# EAGLE board 2DBarcodeScanner-Panel (EAGLE 9.5.2), part 1 of 2
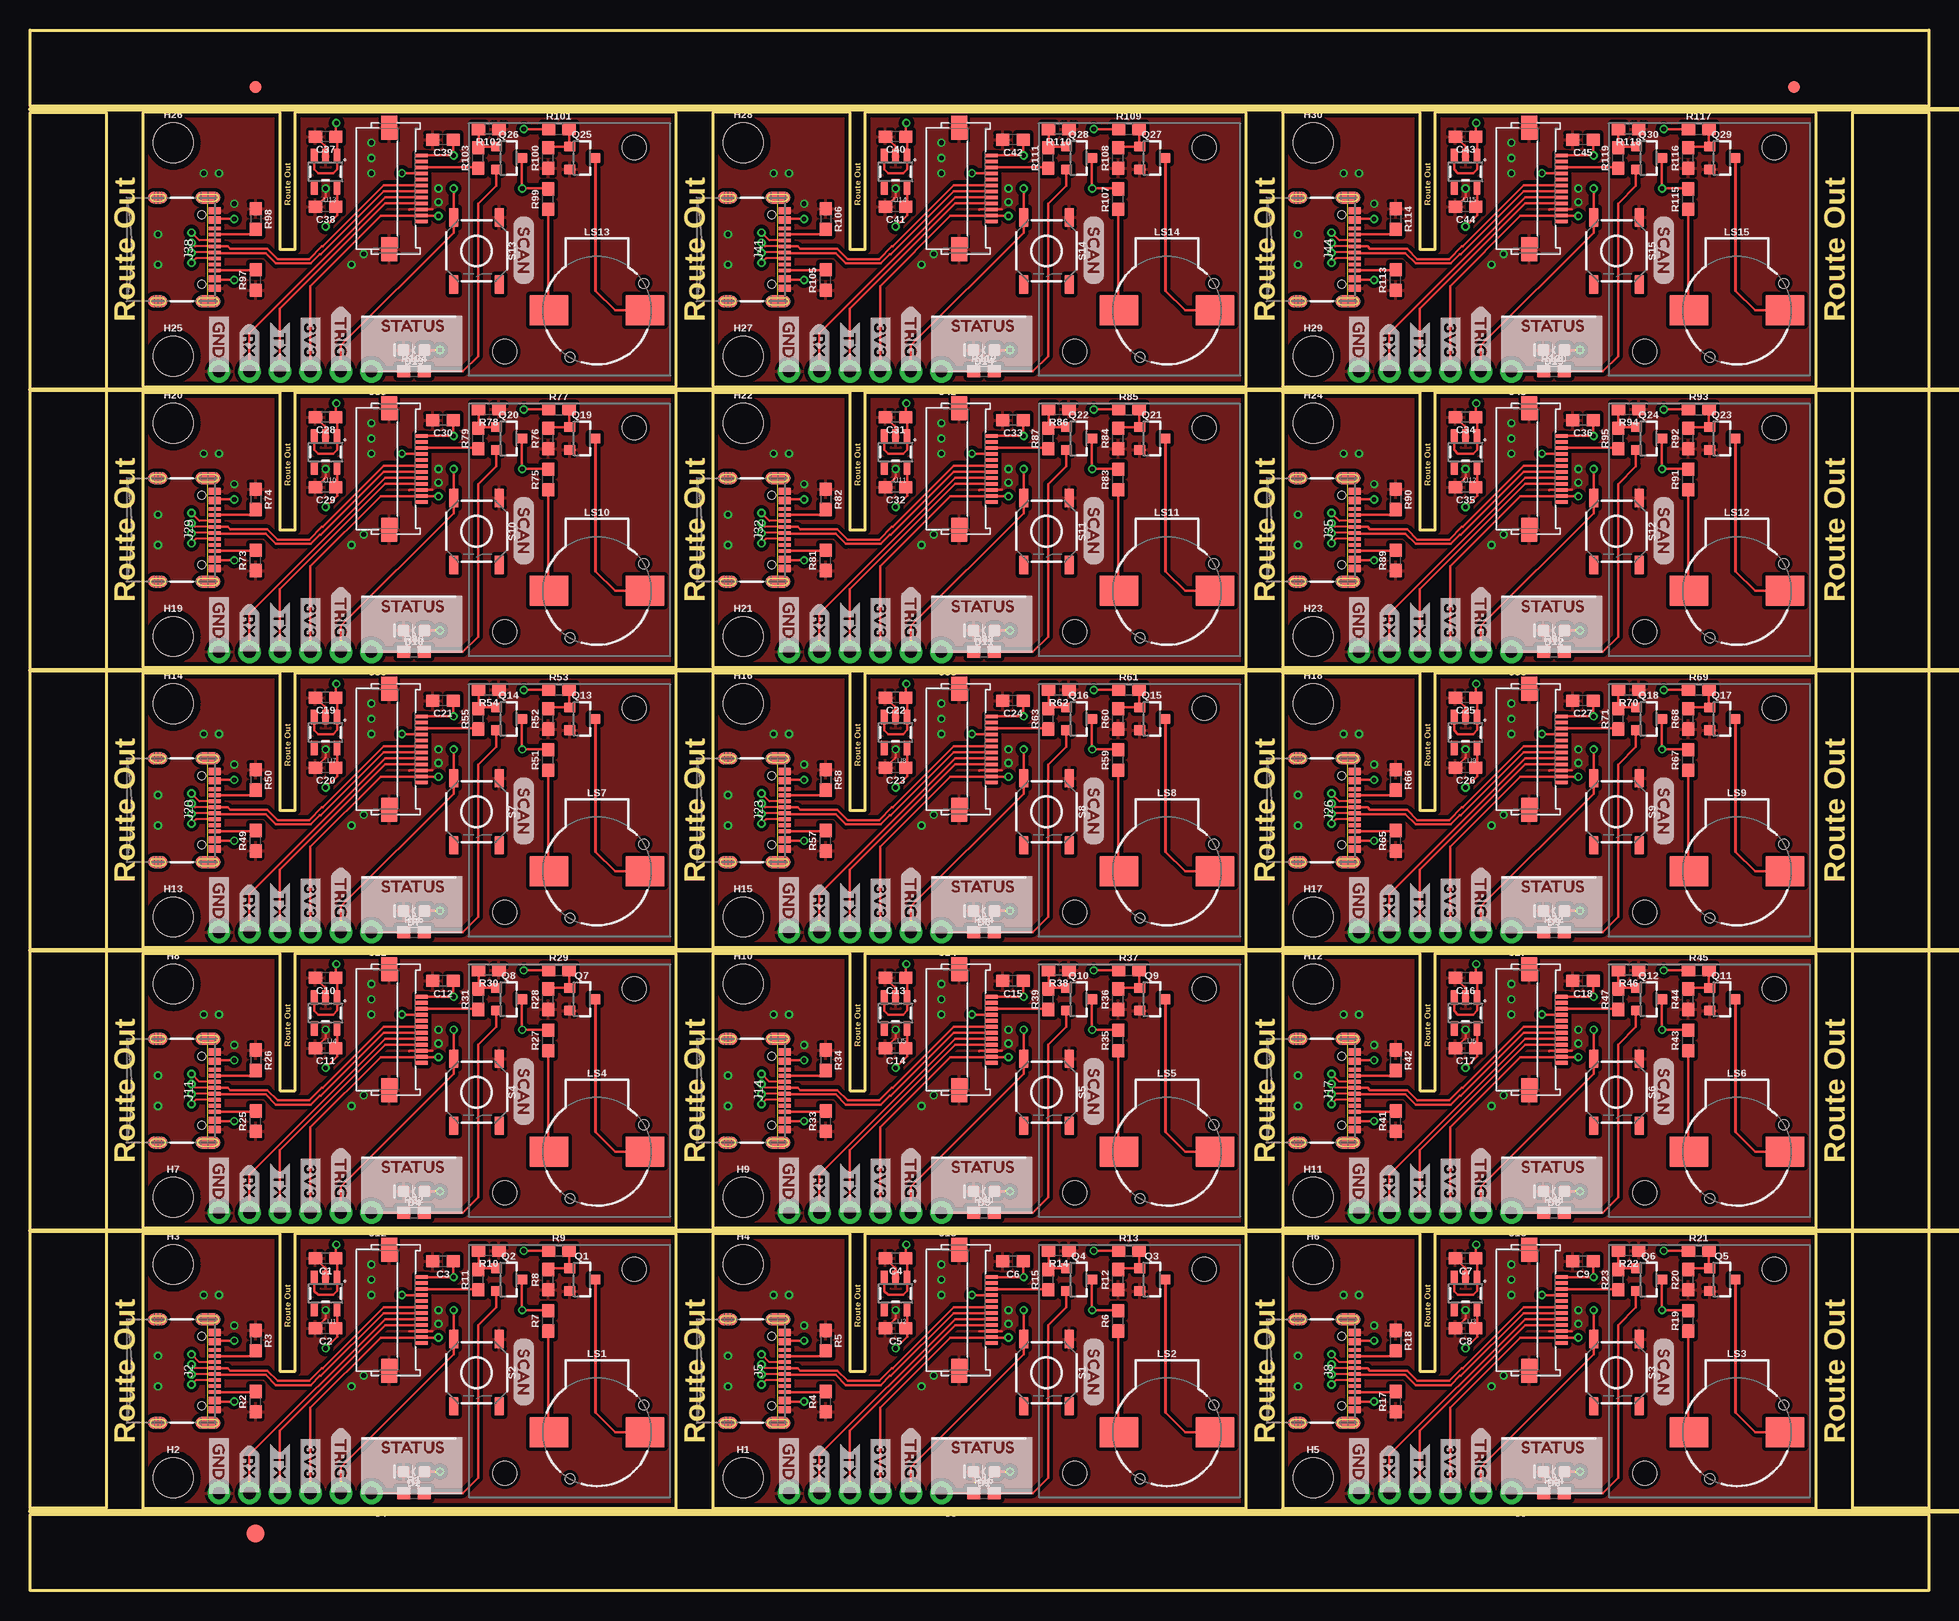
[diagram p0: board, top side]
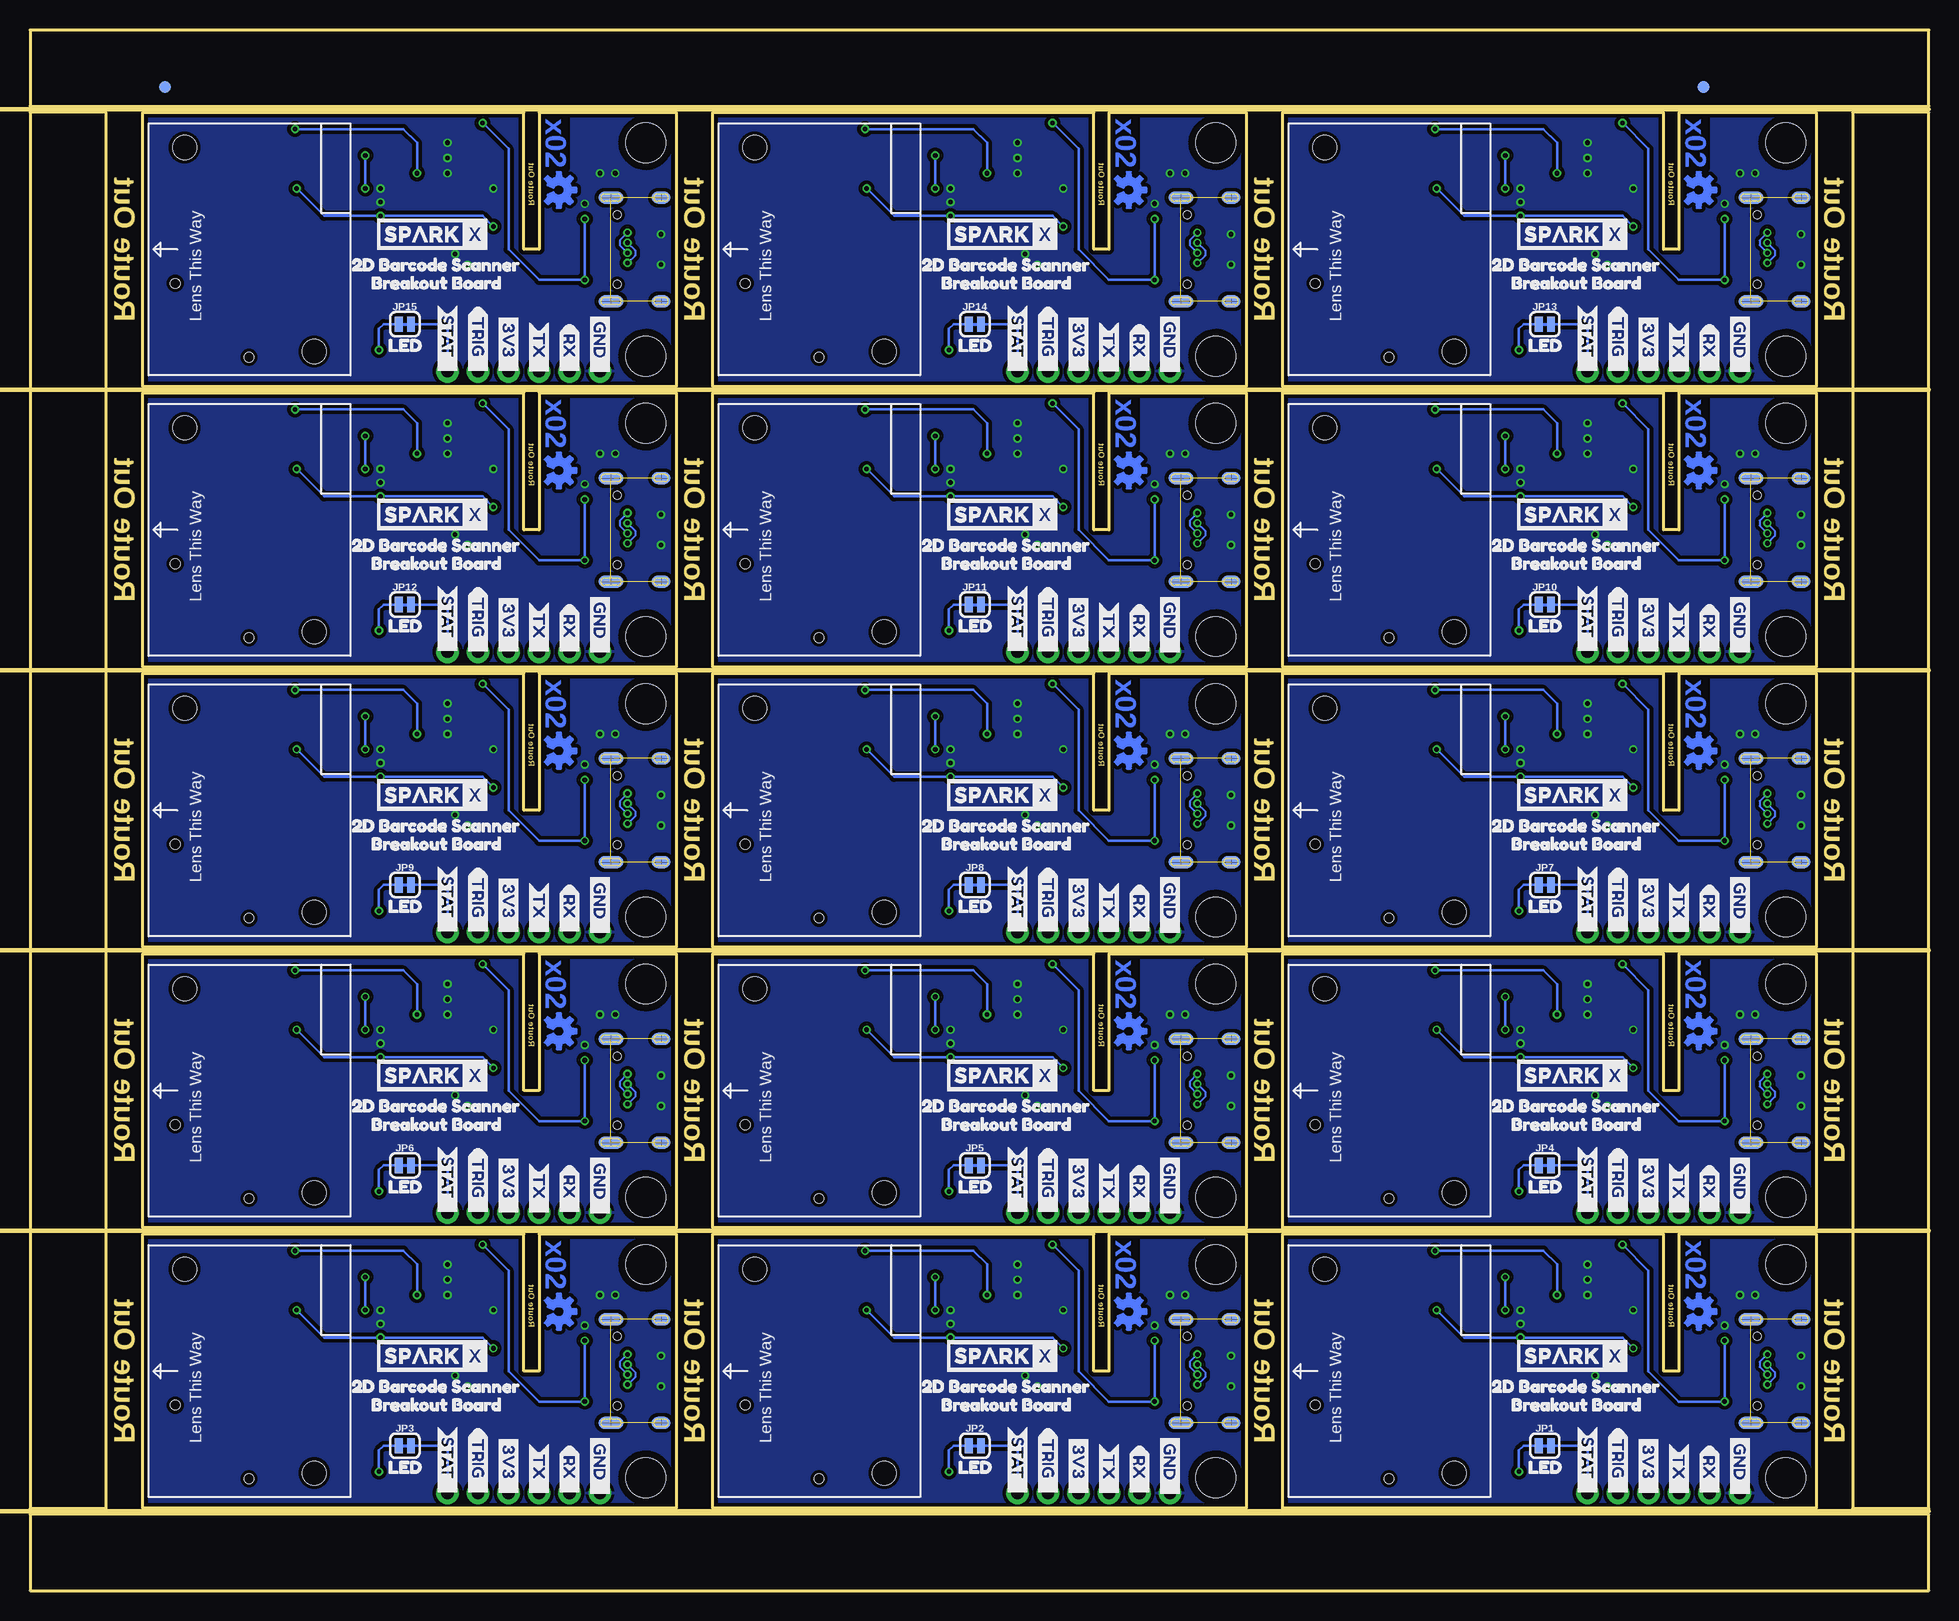
[diagram p1: board, bottom side, seen from below]

Size 158.24 x 130.05 mm. Coordinates in mm from the lower left corner, seen from the top.
Outline: 20.83,29.72 20.83,18.29 22.1,18.29 22.1,29.72 53.85,29.72 53.85,6.86 9.4,6.86 9.4,29.72 20.83,29.72
Outline: 68.33,29.72 68.33,18.29 69.6,18.29 69.6,29.72 101.35,29.72 101.35,6.86 56.9,6.86 56.9,29.72 68.33,29.72
Outline: 115.82,29.72 115.82,18.29 117.09,18.29 117.09,29.72 148.84,29.72 148.84,6.86 104.39,6.86 104.39,29.72 115.82,29.72
Outline: 20.83,53.09 20.83,41.66 22.1,41.66 22.1,53.09 53.85,53.09 53.85,30.23 9.4,30.23 9.4,53.09 20.83,53.09
Outline: 68.33,53.09 68.33,41.66 69.6,41.66 69.6,53.09 101.35,53.09 101.35,30.23 56.9,30.23 56.9,53.09 68.33,53.09
Outline: 115.82,53.09 115.82,41.66 117.09,41.66 117.09,53.09 148.84,53.09 148.84,30.23 104.39,30.23 104.39,53.09 115.82,53.09
Outline: 20.83,76.45 20.83,65.02 22.1,65.02 22.1,76.45 53.85,76.45 53.85,53.59 9.4,53.59 9.4,76.45 20.83,76.45
Outline: 68.33,76.45 68.33,65.02 69.6,65.02 69.6,76.45 101.35,76.45 101.35,53.59 56.9,53.59 56.9,76.45 68.33,76.45
Outline: 115.82,76.45 115.82,65.02 117.09,65.02 117.09,76.45 148.84,76.45 148.84,53.59 104.39,53.59 104.39,76.45 115.82,76.45
Outline: 20.83,99.82 20.83,88.39 22.1,88.39 22.1,99.82 53.85,99.82 53.85,76.96 9.4,76.96 9.4,99.82 20.83,99.82
Outline: 68.33,99.82 68.33,88.39 69.6,88.39 69.6,99.82 101.35,99.82 101.35,76.96 56.9,76.96 56.9,99.82 68.33,99.82
Outline: 115.82,99.82 115.82,88.39 117.09,88.39 117.09,99.82 148.84,99.82 148.84,76.96 104.39,76.96 104.39,99.82 115.82,99.82
Outline: 20.83,123.19 20.83,111.76 22.1,111.76 22.1,123.19 53.85,123.19 53.85,100.33 9.4,100.33 9.4,123.19 20.83,123.19
Outline: 68.33,123.19 68.33,111.76 69.6,111.76 69.6,123.19 101.35,123.19 101.35,100.33 56.9,100.33 56.9,123.19 68.33,123.19
Outline: 115.82,123.19 115.82,111.76 117.09,111.76 117.09,123.19 148.84,123.19 148.84,100.33 104.39,100.33 104.39,123.19 115.82,123.19
Outline: 0,6.35 158.24,6.35 158.24,0 0,0 0,6.35
Outline: 151.89,123.19 158.24,123.19 158.24,6.86 151.89,6.86 151.89,123.19
Outline: 0,130.05 158.24,130.05 158.24,123.7 0,123.7 0,130.05
Outline: 0,123.19 6.35,123.19 6.35,6.86 0,6.86 0,123.19
Copper layers (1*16): Top 0.035mm / dielectric 1.5mm / Bottom 0.035mm
Design rules "2DBarcodeScanner": minimum track width 6mil, minimum drill 0.3mm, track to track 6mil, track to pad 6mil, pad to pad 6mil, via to via 6mil, smd to smd 6mil, copper to edge 6mil, drill to drill 6mil, minimum pad ring 6mil, minimum via ring 6mil, stop-mask expansion 4mil, vias tented up to drill 25mil, thermal gap 10mil
Net classes: 1 power: width 0.178 mm
Milling: 6 lines

## Footprints (pad centres in the part's own frame; a part is rotated, then mirrored left to right if it is on the bottom)
0603 = smd 1.1 x 1: 1 -0.85,0; 2 0.85,0
LED-0603 = smd 1 x 1: A -0.877,0; C 0.877,0
FIDUCIAL-1X2 = smd 1 x 1: 1 0,0
FIDUCIAL-1.5X3 = smd 1.5 x 1.5: 1 0,0
STAND-OFF = hole 3.302: 0,0
CONN_FPC_BOTTOM_12POS_.5MM_R/A = smd 0.3 x 1: P$1 -2.75,0; P$2 -2.25,0; P$3 -1.75,0; P$4 -1.25,0; P$5 -0.75,0; P$6 -0.25,0; P$7 0.25,0; P$8 0.75,0; P$9 1.25,0; P$10 1.75,0; P$11 2.25,0; P$12 2.75,0 | smd 2 x 1.3: P$13 -5.05,-2.7; P$14 5.05,-2.7
USB-C-16P = smd 0.3 x 1: A5 -1.25,-0.34; A6 -0.25,-0.34; A7 0.25,-0.34; A8 1.25,-0.34; B5 1.75,-0.34; B6 0.75,-0.34; B7 -0.75,-0.34; B8 -1.75,-0.34 | smd 0.6 x 1: GND -3.225,-0.34; GND2 3.225,-0.34; VBUS1 -2.45,-0.34; VBUS2 2.45,-0.34 | smd 1 x 2.1: SHLD1 -4.32,-0.915; SHLD2 4.32,-0.915 | smd 1 x 2.1 bottom: SHLD3 -4.32,-0.915; SHLD4 4.32,-0.915 | smd 1 x 1.6: SHLD5 -4.32,-5.095; SHLD8 4.32,-5.095 | smd 1 x 1.6 bottom: SHLD6 -4.32,-5.095; SHLD7 4.32,-5.095 | hole 0.65: -2.89,-1.445; 2.89,-1.445
1X06_NO_SILK = drill 1.016 pad 1.88: 1 0,0; 2 2.54,0; 3 5.08,0; 4 7.62,0; 5 10.16,0; 6 12.7,0
SMT-JUMPER_2_NC_TRACE_SILK = smd 0.635 x 1.27: 1 -0.508,0; 2 0.508,0
BUZZER-CCV = smd 3.2 x 2.5: + 4,0; - -4,0 | hole 0.8: -3.9,-2.25; 2.25,3.9
SOT23-3 = smd 0.8 x 0.9: 1 -0.95,-1; 2 0.95,-1; 3 0,1.1
TACTILE_SWITCH_SMD_5.2MM = smd 1.524 x 0.762: 1 -2.794,1.905; 2 2.794,1.905; 3 -2.794,-1.905; 4 2.794,-1.905
SOT23-5 = smd 0.55 x 1.2: 1 -0.95,-1.3; 2 0,-1.3; 3 0.95,-1.3; 4 0.95,1.3; 5 -0.95,1.3
BARCODE_SCANNER_MOUNT = hole 2: -5.4,8.5; 5.4,-8.5

## Placement (x,y rotation side)
C1  1.0uF  [0603]  24.64,27.69 180 top
C2  1.0uF  [0603]  24.64,21.84 180 top
C3  0.1uF  [0603]  34.42,27.43 180 top
C4  1.0uF  [0603]  72.14,27.69 180 top
C5  1.0uF  [0603]  72.14,21.84 180 top
C6  0.1uF  [0603]  81.91,27.43 180 top
C7  1.0uF  [0603]  119.63,27.69 180 top
C8  1.0uF  [0603]  119.63,21.84 180 top
C9  0.1uF  [0603]  129.41,27.43 180 top
C10  1.0uF  [0603]  24.64,51.05 180 top
C11  1.0uF  [0603]  24.64,45.21 180 top
C12  0.1uF  [0603]  34.42,50.8 180 top
C13  1.0uF  [0603]  72.14,51.05 180 top
C14  1.0uF  [0603]  72.14,45.21 180 top
C15  0.1uF  [0603]  81.91,50.8 180 top
C16  1.0uF  [0603]  119.63,51.05 180 top
C17  1.0uF  [0603]  119.63,45.21 180 top
C18  0.1uF  [0603]  129.41,50.8 180 top
C19  1.0uF  [0603]  24.64,74.42 180 top
C20  1.0uF  [0603]  24.64,68.58 180 top
C21  0.1uF  [0603]  34.42,74.17 180 top
C22  1.0uF  [0603]  72.14,74.42 180 top
C23  1.0uF  [0603]  72.14,68.58 180 top
C24  0.1uF  [0603]  81.91,74.17 180 top
C25  1.0uF  [0603]  119.63,74.42 180 top
C26  1.0uF  [0603]  119.63,68.58 180 top
C27  0.1uF  [0603]  129.41,74.17 180 top
C28  1.0uF  [0603]  24.64,97.79 180 top
C29  1.0uF  [0603]  24.64,91.95 180 top
C30  0.1uF  [0603]  34.42,97.54 180 top
C31  1.0uF  [0603]  72.14,97.79 180 top
C32  1.0uF  [0603]  72.14,91.95 180 top
C33  0.1uF  [0603]  81.91,97.54 180 top
C34  1.0uF  [0603]  119.63,97.79 180 top
C35  1.0uF  [0603]  119.63,91.95 180 top
C36  0.1uF  [0603]  129.41,97.54 180 top
C37  1.0uF  [0603]  24.64,121.16 180 top
C38  1.0uF  [0603]  24.64,115.32 180 top
C39  0.1uF  [0603]  34.42,120.9 180 top
C40  1.0uF  [0603]  72.14,121.16 180 top
C41  1.0uF  [0603]  72.14,115.32 180 top
C42  0.1uF  [0603]  81.91,120.9 180 top
C43  1.0uF  [0603]  119.63,121.16 180 top
C44  1.0uF  [0603]  119.63,115.32 180 top
C45  0.1uF  [0603]  129.41,120.9 180 top
D1  GREEN  [LED-0603]  79.5,9.91 180 top
D2  GREEN  [LED-0603]  32,9.91 180 top
D3  GREEN  [LED-0603]  127,9.91 180 top
D4  GREEN  [LED-0603]  32,33.27 180 top
D5  GREEN  [LED-0603]  79.5,33.27 180 top
D6  GREEN  [LED-0603]  127,33.27 180 top
D7  GREEN  [LED-0603]  32,56.64 180 top
D8  GREEN  [LED-0603]  79.5,56.64 180 top
D9  GREEN  [LED-0603]  127,56.64 180 top
D10  GREEN  [LED-0603]  32,80.01 180 top
D11  GREEN  [LED-0603]  79.5,80.01 180 top
D12  GREEN  [LED-0603]  127,80.01 180 top
D13  GREEN  [LED-0603]  32,103.38 180 top
D14  GREEN  [LED-0603]  79.5,103.38 180 top
D15  GREEN  [LED-0603]  127,103.38 180 top
E$1  [FIDUCIAL-1X2]  18.8,125.29 0 top
E$2  [FIDUCIAL-1X2]  18.8,125.29 0 bottom
E$3  [FIDUCIAL-1X2]  147,125.29 0 top
E$4  [FIDUCIAL-1X2]  147,125.29 0 bottom
E$5  [FIDUCIAL-1.5X3]  18.8,4.76 0 top
FRAME1  FRAME-LETTERNO_PACKAGE  [DUMMY]  9.4,6.86 0 top
FRAME2  FRAME-LETTERNO_PACKAGE  [DUMMY]  56.9,6.86 0 top
FRAME3  FRAME-LETTERNO_PACKAGE  [DUMMY]  104.39,6.86 0 top
FRAME4  FRAME-LETTERNO_PACKAGE  [DUMMY]  9.4,30.23 0 top
FRAME5  FRAME-LETTERNO_PACKAGE  [DUMMY]  56.9,30.23 0 top
FRAME6  FRAME-LETTERNO_PACKAGE  [DUMMY]  104.39,30.23 0 top
FRAME7  FRAME-LETTERNO_PACKAGE  [DUMMY]  9.4,53.59 0 top
FRAME8  FRAME-LETTERNO_PACKAGE  [DUMMY]  56.9,53.59 0 top
FRAME9  FRAME-LETTERNO_PACKAGE  [DUMMY]  104.39,53.59 0 top
FRAME10  FRAME-LETTERNO_PACKAGE  [DUMMY]  9.4,76.96 0 top
FRAME11  FRAME-LETTERNO_PACKAGE  [DUMMY]  56.9,76.96 0 top
FRAME12  FRAME-LETTERNO_PACKAGE  [DUMMY]  104.39,76.96 0 top
FRAME13  FRAME-LETTERNO_PACKAGE  [DUMMY]  9.4,100.33 0 top
FRAME14  FRAME-LETTERNO_PACKAGE  [DUMMY]  56.9,100.33 0 top
FRAME15  FRAME-LETTERNO_PACKAGE  [DUMMY]  104.39,100.33 0 top
H1  STAND-OFF  [STAND-OFF]  59.44,9.4 0 top
H2  STAND-OFF  [STAND-OFF]  11.94,9.4 0 top
H3  STAND-OFF  [STAND-OFF]  11.94,27.18 0 top
H4  STAND-OFF  [STAND-OFF]  59.44,27.18 0 top
H5  STAND-OFF  [STAND-OFF]  106.93,9.4 0 top
H6  STAND-OFF  [STAND-OFF]  106.93,27.18 0 top
H7  STAND-OFF  [STAND-OFF]  11.94,32.77 0 top
H8  STAND-OFF  [STAND-OFF]  11.94,50.55 0 top
H9  STAND-OFF  [STAND-OFF]  59.44,32.77 0 top
H10  STAND-OFF  [STAND-OFF]  59.44,50.55 0 top
H11  STAND-OFF  [STAND-OFF]  106.93,32.77 0 top
H12  STAND-OFF  [STAND-OFF]  106.93,50.55 0 top
H13  STAND-OFF  [STAND-OFF]  11.94,56.13 0 top
H14  STAND-OFF  [STAND-OFF]  11.94,73.91 0 top
H15  STAND-OFF  [STAND-OFF]  59.44,56.13 0 top
H16  STAND-OFF  [STAND-OFF]  59.44,73.91 0 top
H17  STAND-OFF  [STAND-OFF]  106.93,56.13 0 top
H18  STAND-OFF  [STAND-OFF]  106.93,73.91 0 top
H19  STAND-OFF  [STAND-OFF]  11.94,79.5 0 top
H20  STAND-OFF  [STAND-OFF]  11.94,97.28 0 top
H21  STAND-OFF  [STAND-OFF]  59.44,79.5 0 top
H22  STAND-OFF  [STAND-OFF]  59.44,97.28 0 top
H23  STAND-OFF  [STAND-OFF]  106.93,79.5 0 top
H24  STAND-OFF  [STAND-OFF]  106.93,97.28 0 top
H25  STAND-OFF  [STAND-OFF]  11.94,102.87 0 top
H26  STAND-OFF  [STAND-OFF]  11.94,120.65 0 top
H27  STAND-OFF  [STAND-OFF]  59.44,102.87 0 top
H28  STAND-OFF  [STAND-OFF]  59.44,120.65 0 top
H29  STAND-OFF  [STAND-OFF]  106.93,102.87 0 top
H30  STAND-OFF  [STAND-OFF]  106.93,120.65 0 top
J1  BARCODE_ENGINE_CONN  [CONN_FPC_BOTTOM_12POS_.5MM_R/A]  32.64,23.37 270 top
J2  [USB-C-16P]  15.75,18.29 270 top
J3  BARCODE_ENGINE_CONN  [CONN_FPC_BOTTOM_12POS_.5MM_R/A]  80.14,23.37 270 top
J4  [1X06_NO_SILK]  28.45,8.13 180 top
J5  [USB-C-16P]  63.25,18.29 270 top
J6  [1X06_NO_SILK]  75.95,8.13 180 top
J7  BARCODE_ENGINE_CONN  [CONN_FPC_BOTTOM_12POS_.5MM_R/A]  127.63,23.37 270 top
J8  [USB-C-16P]  110.74,18.29 270 top
J9  [1X06_NO_SILK]  123.44,8.13 180 top
J10  BARCODE_ENGINE_CONN  [CONN_FPC_BOTTOM_12POS_.5MM_R/A]  32.64,46.74 270 top
J11  [USB-C-16P]  15.75,41.66 270 top
J12  [1X06_NO_SILK]  28.45,31.5 180 top
J13  BARCODE_ENGINE_CONN  [CONN_FPC_BOTTOM_12POS_.5MM_R/A]  80.14,46.74 270 top
J14  [USB-C-16P]  63.25,41.66 270 top
J15  [1X06_NO_SILK]  75.95,31.5 180 top
J16  BARCODE_ENGINE_CONN  [CONN_FPC_BOTTOM_12POS_.5MM_R/A]  127.63,46.74 270 top
J17  [USB-C-16P]  110.74,41.66 270 top
J18  [1X06_NO_SILK]  123.44,31.5 180 top
J19  BARCODE_ENGINE_CONN  [CONN_FPC_BOTTOM_12POS_.5MM_R/A]  32.64,70.1 270 top
J20  [USB-C-16P]  15.75,65.02 270 top
J21  [1X06_NO_SILK]  28.45,54.86 180 top
J22  BARCODE_ENGINE_CONN  [CONN_FPC_BOTTOM_12POS_.5MM_R/A]  80.14,70.1 270 top
J23  [USB-C-16P]  63.25,65.02 270 top
J24  [1X06_NO_SILK]  75.95,54.86 180 top
J25  BARCODE_ENGINE_CONN  [CONN_FPC_BOTTOM_12POS_.5MM_R/A]  127.63,70.1 270 top
J26  [USB-C-16P]  110.74,65.02 270 top
J27  [1X06_NO_SILK]  123.44,54.86 180 top
J28  BARCODE_ENGINE_CONN  [CONN_FPC_BOTTOM_12POS_.5MM_R/A]  32.64,93.47 270 top
J29  [USB-C-16P]  15.75,88.39 270 top
J30  [1X06_NO_SILK]  28.45,78.23 180 top
J31  BARCODE_ENGINE_CONN  [CONN_FPC_BOTTOM_12POS_.5MM_R/A]  80.14,93.47 270 top
J32  [USB-C-16P]  63.25,88.39 270 top
J33  [1X06_NO_SILK]  75.95,78.23 180 top
J34  BARCODE_ENGINE_CONN  [CONN_FPC_BOTTOM_12POS_.5MM_R/A]  127.63,93.47 270 top
J35  [USB-C-16P]  110.74,88.39 270 top
J36  [1X06_NO_SILK]  123.44,78.23 180 top
J37  BARCODE_ENGINE_CONN  [CONN_FPC_BOTTOM_12POS_.5MM_R/A]  32.64,116.84 270 top
J38  [USB-C-16P]  15.75,111.76 270 top
J39  [1X06_NO_SILK]  28.45,101.6 180 top
J40  BARCODE_ENGINE_CONN  [CONN_FPC_BOTTOM_12POS_.5MM_R/A]  80.14,116.84 270 top
J41  [USB-C-16P]  63.25,111.76 270 top
J42  [1X06_NO_SILK]  75.95,101.6 180 top
J43  BARCODE_ENGINE_CONN  [CONN_FPC_BOTTOM_12POS_.5MM_R/A]  127.63,116.84 270 top
J44  [USB-C-16P]  110.74,111.76 270 top
J45  [1X06_NO_SILK]  123.44,101.6 180 top
JP1  JUMPER-SMT_2_NC_TRACE_SILK  [SMT-JUMPER_2_NC_TRACE_SILK]  32,12.06 0 bottom
JP2  JUMPER-SMT_2_NC_TRACE_SILK  [SMT-JUMPER_2_NC_TRACE_SILK]  79.5,12.06 0 bottom
JP3  JUMPER-SMT_2_NC_TRACE_SILK  [SMT-JUMPER_2_NC_TRACE_SILK]  127,12.06 0 bottom
JP4  JUMPER-SMT_2_NC_TRACE_SILK  [SMT-JUMPER_2_NC_TRACE_SILK]  32,35.43 0 bottom
JP5  JUMPER-SMT_2_NC_TRACE_SILK  [SMT-JUMPER_2_NC_TRACE_SILK]  79.5,35.43 0 bottom
JP6  JUMPER-SMT_2_NC_TRACE_SILK  [SMT-JUMPER_2_NC_TRACE_SILK]  127,35.43 0 bottom
JP7  JUMPER-SMT_2_NC_TRACE_SILK  [SMT-JUMPER_2_NC_TRACE_SILK]  32,58.8 0 bottom
JP8  JUMPER-SMT_2_NC_TRACE_SILK  [SMT-JUMPER_2_NC_TRACE_SILK]  79.5,58.8 0 bottom
JP9  JUMPER-SMT_2_NC_TRACE_SILK  [SMT-JUMPER_2_NC_TRACE_SILK]  127,58.8 0 bottom
JP10  JUMPER-SMT_2_NC_TRACE_SILK  [SMT-JUMPER_2_NC_TRACE_SILK]  32,82.17 0 bottom
JP11  JUMPER-SMT_2_NC_TRACE_SILK  [SMT-JUMPER_2_NC_TRACE_SILK]  79.5,82.17 0 bottom
JP12  JUMPER-SMT_2_NC_TRACE_SILK  [SMT-JUMPER_2_NC_TRACE_SILK]  127,82.17 0 bottom
JP13  JUMPER-SMT_2_NC_TRACE_SILK  [SMT-JUMPER_2_NC_TRACE_SILK]  32,105.54 0 bottom
JP14  JUMPER-SMT_2_NC_TRACE_SILK  [SMT-JUMPER_2_NC_TRACE_SILK]  79.5,105.54 0 bottom
JP15  JUMPER-SMT_2_NC_TRACE_SILK  [SMT-JUMPER_2_NC_TRACE_SILK]  127,105.54 0 bottom
LS1  BUZZER-SMD  [BUZZER-CCV]  47.24,13.21 180 top
LS2  BUZZER-SMD  [BUZZER-CCV]  94.74,13.21 180 top
LS3  BUZZER-SMD  [BUZZER-CCV]  142.24,13.21 180 top
LS4  BUZZER-SMD  [BUZZER-CCV]  47.24,36.58 180 top
LS5  BUZZER-SMD  [BUZZER-CCV]  94.74,36.58 180 top
LS6  BUZZER-SMD  [BUZZER-CCV]  142.24,36.58 180 top
LS7  BUZZER-SMD  [BUZZER-CCV]  47.24,59.94 180 top
LS8  BUZZER-SMD  [BUZZER-CCV]  94.74,59.94 180 top
LS9  BUZZER-SMD  [BUZZER-CCV]  142.24,59.94 180 top
LS10  BUZZER-SMD  [BUZZER-CCV]  47.24,83.31 180 top
LS11  BUZZER-SMD  [BUZZER-CCV]  94.74,83.31 180 top
LS12  BUZZER-SMD  [BUZZER-CCV]  142.24,83.31 180 top
LS13  BUZZER-SMD  [BUZZER-CCV]  47.24,106.68 180 top
LS14  BUZZER-SMD  [BUZZER-CCV]  94.74,106.68 180 top
LS15  BUZZER-SMD  [BUZZER-CCV]  142.24,106.68 180 top
Q1  600mA/40V  [SOT23-3]  45.97,25.91 270 top
Q2  600mA/40V  [SOT23-3]  39.88,25.91 270 top
Q3  600mA/40V  [SOT23-3]  93.47,25.91 270 top
Q4  600mA/40V  [SOT23-3]  87.38,25.91 270 top
Q5  600mA/40V  [SOT23-3]  140.97,25.91 270 top
Q6  600mA/40V  [SOT23-3]  134.87,25.91 270 top
Q7  600mA/40V  [SOT23-3]  45.97,49.28 270 top
Q8  600mA/40V  [SOT23-3]  39.88,49.28 270 top
Q9  600mA/40V  [SOT23-3]  93.47,49.28 270 top
Q10  600mA/40V  [SOT23-3]  87.38,49.28 270 top
Q11  600mA/40V  [SOT23-3]  140.97,49.28 270 top
Q12  600mA/40V  [SOT23-3]  134.87,49.28 270 top
Q13  600mA/40V  [SOT23-3]  45.97,72.64 270 top
Q14  600mA/40V  [SOT23-3]  39.88,72.64 270 top
Q15  600mA/40V  [SOT23-3]  93.47,72.64 270 top
Q16  600mA/40V  [SOT23-3]  87.38,72.64 270 top
Q17  600mA/40V  [SOT23-3]  140.97,72.64 270 top
Q18  600mA/40V  [SOT23-3]  134.87,72.64 270 top
Q19  600mA/40V  [SOT23-3]  45.97,96.01 270 top
Q20  600mA/40V  [SOT23-3]  39.88,96.01 270 top
Q21  600mA/40V  [SOT23-3]  93.47,96.01 270 top
Q22  600mA/40V  [SOT23-3]  87.38,96.01 270 top
Q23  600mA/40V  [SOT23-3]  140.97,96.01 270 top
Q24  600mA/40V  [SOT23-3]  134.87,96.01 270 top
Q25  600mA/40V  [SOT23-3]  45.97,119.38 270 top
Q26  600mA/40V  [SOT23-3]  39.88,119.38 270 top
Q27  600mA/40V  [SOT23-3]  93.47,119.38 270 top
Q28  600mA/40V  [SOT23-3]  87.38,119.38 270 top
Q29  600mA/40V  [SOT23-3]  140.97,119.38 270 top
Q30  600mA/40V  [SOT23-3]  134.87,119.38 270 top
R1  470  [0603]  32,8.13 0 top
R2  5.1k  [0603]  18.8,15.75 90 top
R3  5.1k  [0603]  18.8,20.83 270 top
R4  5.1k  [0603]  66.29,15.75 90 top
R5  5.1k  [0603]  66.29,20.83 270 top
R6  10  [0603]  90.68,22.48 90 top
R7  10  [0603]  43.18,22.48 90 top
R8  10k  [0603]  43.18,25.91 90 top
R9  1k  [0603]  44.07,28.32 0 top
R10  10k  [0603]  38.23,28.32 180 top
R11  1k  [0603]  37.34,25.91 90 top
R12  10k  [0603]  90.68,25.91 90 top
R13  1k  [0603]  91.57,28.32 0 top
R14  10k  [0603]  85.72,28.32 180 top
R15  1k  [0603]  84.84,25.91 90 top
R16  470  [0603]  79.5,8.13 0 top
R17  5.1k  [0603]  113.79,15.75 90 top
R18  5.1k  [0603]  113.79,20.83 270 top
R19  10  [0603]  138.18,22.48 90 top
R20  10k  [0603]  138.18,25.91 90 top
R21  1k  [0603]  139.06,28.32 0 top
R22  10k  [0603]  133.22,28.32 180 top
R23  1k  [0603]  132.33,25.91 90 top
R24  470  [0603]  127,8.13 0 top
R25  5.1k  [0603]  18.8,39.12 90 top
R26  5.1k  [0603]  18.8,44.2 270 top
R27  10  [0603]  43.18,45.85 90 top
R28  10k  [0603]  43.18,49.28 90 top
R29  1k  [0603]  44.07,51.69 0 top
R30  10k  [0603]  38.23,51.69 180 top
R31  1k  [0603]  37.34,49.28 90 top
R32  470  [0603]  32,31.5 0 top
R33  5.1k  [0603]  66.29,39.12 90 top
R34  5.1k  [0603]  66.29,44.2 270 top
R35  10  [0603]  90.68,45.85 90 top
R36  10k  [0603]  90.68,49.28 90 top
R37  1k  [0603]  91.57,51.69 0 top
R38  10k  [0603]  85.72,51.69 180 top
R39  1k  [0603]  84.84,49.28 90 top
R40  470  [0603]  79.5,31.5 0 top
R41  5.1k  [0603]  113.79,39.12 90 top
R42  5.1k  [0603]  113.79,44.2 270 top
R43  10  [0603]  138.18,45.85 90 top
R44  10k  [0603]  138.18,49.28 90 top
R45  1k  [0603]  139.06,51.69 0 top
R46  10k  [0603]  133.22,51.69 180 top
R47  1k  [0603]  132.33,49.28 90 top
R48  470  [0603]  127,31.5 0 top
R49  5.1k  [0603]  18.8,62.48 90 top
R50  5.1k  [0603]  18.8,67.56 270 top
R51  10  [0603]  43.18,69.22 90 top
R52  10k  [0603]  43.18,72.64 90 top
R53  1k  [0603]  44.07,75.06 0 top
R54  10k  [0603]  38.23,75.06 180 top
R55  1k  [0603]  37.34,72.64 90 top
R56  470  [0603]  32,54.86 0 top
R57  5.1k  [0603]  66.29,62.48 90 top
R58  5.1k  [0603]  66.29,67.56 270 top
R59  10  [0603]  90.68,69.22 90 top
R60  10k  [0603]  90.68,72.64 90 top
R61  1k  [0603]  91.57,75.06 0 top
R62  10k  [0603]  85.72,75.06 180 top
R63  1k  [0603]  84.84,72.64 90 top
R64  470  [0603]  79.5,54.86 0 top
R65  5.1k  [0603]  113.79,62.48 90 top
R66  5.1k  [0603]  113.79,67.56 270 top
R67  10  [0603]  138.18,69.22 90 top
R68  10k  [0603]  138.18,72.64 90 top
R69  1k  [0603]  139.06,75.06 0 top
R70  10k  [0603]  133.22,75.06 180 top
R71  1k  [0603]  132.33,72.64 90 top
R72  470  [0603]  127,54.86 0 top
R73  5.1k  [0603]  18.8,85.85 90 top
R74  5.1k  [0603]  18.8,90.93 270 top
R75  10  [0603]  43.18,92.58 90 top
R76  10k  [0603]  43.18,96.01 90 top
R77  1k  [0603]  44.07,98.42 0 top
R78  10k  [0603]  38.23,98.42 180 top
R79  1k  [0603]  37.34,96.01 90 top
R80  470  [0603]  32,78.23 0 top
R81  5.1k  [0603]  66.29,85.85 90 top
R82  5.1k  [0603]  66.29,90.93 270 top
R83  10  [0603]  90.68,92.58 90 top
R84  10k  [0603]  90.68,96.01 90 top
R85  1k  [0603]  91.57,98.42 0 top
R86  10k  [0603]  85.72,98.42 180 top
R87  1k  [0603]  84.84,96.01 90 top
R88  470  [0603]  79.5,78.23 0 top
R89  5.1k  [0603]  113.79,85.85 90 top
R90  5.1k  [0603]  113.79,90.93 270 top
R91  10  [0603]  138.18,92.58 90 top
R92  10k  [0603]  138.18,96.01 90 top
R93  1k  [0603]  139.06,98.42 0 top
R94  10k  [0603]  133.22,98.42 180 top
R95  1k  [0603]  132.33,96.01 90 top
R96  470  [0603]  127,78.23 0 top
R97  5.1k  [0603]  18.8,109.22 90 top
R98  5.1k  [0603]  18.8,114.3 270 top
R99  10  [0603]  43.18,115.95 90 top
R100  10k  [0603]  43.18,119.38 90 top
R101  1k  [0603]  44.07,121.79 0 top
R102  10k  [0603]  38.23,121.79 180 top
R103  1k  [0603]  37.34,119.38 90 top
R104  470  [0603]  32,101.6 0 top
R105  5.1k  [0603]  66.29,109.22 90 top
R106  5.1k  [0603]  66.29,114.3 270 top
R107  10  [0603]  90.68,115.95 90 top
R108  10k  [0603]  90.68,119.38 90 top
R109  1k  [0603]  91.57,121.79 0 top
R110  10k  [0603]  85.72,121.79 180 top
R111  1k  [0603]  84.84,119.38 90 top
R112  470  [0603]  79.5,101.6 0 top
R113  5.1k  [0603]  113.79,109.22 90 top
R114  5.1k  [0603]  113.79,114.3 270 top
R115  10  [0603]  138.18,115.95 90 top
R116  10k  [0603]  138.18,119.38 90 top
R117  1k  [0603]  139.06,121.79 0 top
R118  10k  [0603]  133.22,121.79 180 top
R119  1k  [0603]  132.33,119.38 90 top
R120  470  [0603]  127,101.6 0 top
S1  MOMENTARY-SWITCH-SPST-SMD-5.2MM-TALL  [TACTILE_SWITCH_SMD_5.2MM]  84.71,18.16 270 top
S2  MOMENTARY-SWITCH-SPST-SMD-5.2MM-TALL  [TACTILE_SWITCH_SMD_5.2MM]  37.21,18.16 270 top
S3  MOMENTARY-SWITCH-SPST-SMD-5.2MM-TALL  [TACTILE_SWITCH_SMD_5.2MM]  132.21,18.16 270 top
S4  MOMENTARY-SWITCH-SPST-SMD-5.2MM-TALL  [TACTILE_SWITCH_SMD_5.2MM]  37.21,41.53 270 top
S5  MOMENTARY-SWITCH-SPST-SMD-5.2MM-TALL  [TACTILE_SWITCH_SMD_5.2MM]  84.71,41.53 270 top
S6  MOMENTARY-SWITCH-SPST-SMD-5.2MM-TALL  [TACTILE_SWITCH_SMD_5.2MM]  132.21,41.53 270 top
S7  MOMENTARY-SWITCH-SPST-SMD-5.2MM-TALL  [TACTILE_SWITCH_SMD_5.2MM]  37.21,64.9 270 top
S8  MOMENTARY-SWITCH-SPST-SMD-5.2MM-TALL  [TACTILE_SWITCH_SMD_5.2MM]  84.71,64.9 270 top
S9  MOMENTARY-SWITCH-SPST-SMD-5.2MM-TALL  [TACTILE_SWITCH_SMD_5.2MM]  132.21,64.9 270 top
S10  MOMENTARY-SWITCH-SPST-SMD-5.2MM-TALL  [TACTILE_SWITCH_SMD_5.2MM]  37.21,88.27 270 top
S11  MOMENTARY-SWITCH-SPST-SMD-5.2MM-TALL  [TACTILE_SWITCH_SMD_5.2MM]  84.71,88.27 270 top
S12  MOMENTARY-SWITCH-SPST-SMD-5.2MM-TALL  [TACTILE_SWITCH_SMD_5.2MM]  132.21,88.27 270 top
S13  MOMENTARY-SWITCH-SPST-SMD-5.2MM-TALL  [TACTILE_SWITCH_SMD_5.2MM]  37.21,111.63 270 top
S14  MOMENTARY-SWITCH-SPST-SMD-5.2MM-TALL  [TACTILE_SWITCH_SMD_5.2MM]  84.71,111.63 270 top
S15  MOMENTARY-SWITCH-SPST-SMD-5.2MM-TALL  [TACTILE_SWITCH_SMD_5.2MM]  132.21,111.63 270 top
U1  3.3V  [SOT23-5]  24.64,24.77 180 top
U2  3.3V  [SOT23-5]  72.14,24.77 180 top
U3  3.3V  [SOT23-5]  119.63,24.77 180 top
U4  3.3V  [SOT23-5]  24.64,48.13 180 top
U5  3.3V  [SOT23-5]  72.14,48.13 180 top
U6  3.3V  [SOT23-5]  119.63,48.13 180 top
U7  3.3V  [SOT23-5]  24.64,71.5 180 top
U8  3.3V  [SOT23-5]  72.14,71.5 180 top
U9  3.3V  [SOT23-5]  119.63,71.5 180 top
U10  3.3V  [SOT23-5]  24.64,94.87 180 top
U11  3.3V  [SOT23-5]  72.14,94.87 180 top
U12  3.3V  [SOT23-5]  119.63,94.87 180 top
U13  3.3V  [SOT23-5]  24.64,118.24 180 top
U14  3.3V  [SOT23-5]  72.14,118.24 180 top
U15  3.3V  [SOT23-5]  119.63,118.24 180 top
U$1  BARCODE_SCANNER_MOUNT  [BARCODE_SCANNER_MOUNT]  44.96,18.29 180 bottom
U$2  [STATUS3]  28.32,11.94 0 top
U$3  [STAT__5]  28.45,13.72 270 bottom
U$4  [TRIG__4]  25.91,13.59 270 bottom
U$5  [TRIG__4]  25.91,13.59 270 top
U$6  [3V3__3]  23.37,13.08 270 top
U$7  [SCAN4]  41.15,21.08 270 top
U$8  [LED0]  34.29,10.29 0 bottom
U$9  [3V3__3]  23.37,13.08 270 bottom
U$10  [TX__2]  20.83,12.32 270 bottom
U$11  [TX__2]  20.83,12.32 270 top
U$12  [RX__1]  18.29,12.19 270 top
U$13  [RX__1]  18.29,12.19 270 bottom
U$14  [GND__0]  15.75,13.21 270 bottom
U$15  [GND__0]  15.75,13.21 270 top
U$16  BARCODE_SCANNER_MOUNT  [BARCODE_SCANNER_MOUNT]  92.46,18.29 180 bottom
U$17  [2D_BARCODE_SCANNER0]  37.34,17.02 0 bottom
U$18  [BREAKOUT_BOARD1]  35.69,15.49 0 bottom
U$19  [SCAN4]  88.65,21.08 270 top
U$20  [SPARKX-MEDIUM]  29.72,19.56 0 bottom
U$21  [OSHW-LOGO-S_COPPER]  19.18,23.24 270 bottom
U$22  [2D_BARCODE_SCANNER0]  84.84,17.02 0 bottom
U$23  [BREAKOUT_BOARD1]  83.19,15.49 0 bottom
U$24  [SPARKX-MEDIUM]  77.22,19.56 0 bottom
U$25  [OSHW-LOGO-S_COPPER]  66.67,23.24 270 bottom
U$26  [STAT__5]  75.95,13.72 270 bottom
U$27  [TRIG__4]  73.41,13.59 270 bottom
U$28  [TRIG__4]  73.41,13.59 270 top
U$29  [3V3__3]  70.87,13.08 270 top
U$30  [3V3__3]  70.87,13.08 270 bottom
U$31  [TX__2]  68.33,12.32 270 bottom
U$32  [TX__2]  68.33,12.32 270 top
U$33  [RX__1]  65.79,12.19 270 top
U$34  [RX__1]  65.79,12.19 270 bottom
U$35  [GND__0]  63.25,13.21 270 bottom
U$36  [GND__0]  63.25,13.21 270 top
U$37  [STATUS3]  75.82,11.94 0 top
U$38  [LED0]  81.79,10.29 0 bottom
U$39  BARCODE_SCANNER_MOUNT  [BARCODE_SCANNER_MOUNT]  139.95,18.29 180 bottom
U$40  [SCAN4]  136.14,21.08 270 top
U$41  [2D_BARCODE_SCANNER0]  132.33,17.02 0 bottom
U$42  [BREAKOUT_BOARD1]  130.68,15.49 0 bottom
U$43  [SPARKX-MEDIUM]  124.71,19.56 0 bottom
U$44  [OSHW-LOGO-S_COPPER]  114.17,23.24 270 bottom
U$45  [STAT__5]  123.44,13.72 270 bottom
U$46  [TRIG__4]  120.9,13.59 270 bottom
U$47  [TRIG__4]  120.9,13.59 270 top
U$48  [3V3__3]  118.36,13.08 270 top
U$49  [3V3__3]  118.36,13.08 270 bottom
U$50  [TX__2]  115.82,12.32 270 bottom
U$51  [TX__2]  115.82,12.32 270 top
U$52  [RX__1]  113.28,12.19 270 top
U$53  [RX__1]  113.28,12.19 270 bottom
U$54  [GND__0]  110.74,13.21 270 bottom
U$55  [GND__0]  110.74,13.21 270 top
U$56  [STATUS3]  123.32,11.94 0 top
U$57  [LED0]  129.29,10.29 0 bottom
U$58  BARCODE_SCANNER_MOUNT  [BARCODE_SCANNER_MOUNT]  44.96,41.66 180 bottom
U$59  [SCAN4]  41.15,44.45 270 top
U$60  [2D_BARCODE_SCANNER0]  37.34,40.39 0 bottom
U$61  [BREAKOUT_BOARD1]  35.69,38.86 0 bottom
U$62  [SPARKX-MEDIUM]  29.72,42.93 0 bottom
U$63  [OSHW-LOGO-S_COPPER]  19.18,46.61 270 bottom
U$64  [STAT__5]  28.45,37.08 270 bottom
U$65  [TRIG__4]  25.91,36.96 270 bottom
U$66  [TRIG__4]  25.91,36.96 270 top
U$67  [3V3__3]  23.37,36.45 270 top
U$68  [3V3__3]  23.37,36.45 270 bottom
U$69  [TX__2]  20.83,35.69 270 bottom
U$70  [TX__2]  20.83,35.69 270 top
U$71  [RX__1]  18.29,35.56 270 top
U$72  [RX__1]  18.29,35.56 270 bottom
U$73  [GND__0]  15.75,36.58 270 bottom
U$74  [GND__0]  15.75,36.58 270 top
U$75  [STATUS3]  28.32,35.31 0 top
U$76  [LED0]  34.29,33.66 0 bottom
U$77  BARCODE_SCANNER_MOUNT  [BARCODE_SCANNER_MOUNT]  92.46,41.66 180 bottom
U$78  [SCAN4]  88.65,44.45 270 top
U$79  [2D_BARCODE_SCANNER0]  84.84,40.39 0 bottom
U$80  [BREAKOUT_BOARD1]  83.19,38.86 0 bottom
U$81  [SPARKX-MEDIUM]  77.22,42.93 0 bottom
U$82  [OSHW-LOGO-S_COPPER]  66.67,46.61 270 bottom
U$83  [STAT__5]  75.95,37.08 270 bottom
U$84  [TRIG__4]  73.41,36.96 270 bottom
U$85  [TRIG__4]  73.41,36.96 270 top
U$86  [3V3__3]  70.87,36.45 270 top
U$87  [3V3__3]  70.87,36.45 270 bottom
U$88  [TX__2]  68.33,35.69 270 bottom
U$89  [TX__2]  68.33,35.69 270 top
U$90  [RX__1]  65.79,35.56 270 top
U$91  [RX__1]  65.79,35.56 270 bottom
U$92  [GND__0]  63.25,36.58 270 bottom
U$93  [GND__0]  63.25,36.58 270 top
U$94  [STATUS3]  75.82,35.31 0 top
U$95  [LED0]  81.79,33.66 0 bottom
U$96  BARCODE_SCANNER_MOUNT  [BARCODE_SCANNER_MOUNT]  139.95,41.66 180 bottom
U$97  [SCAN4]  136.14,44.45 270 top
U$98  [2D_BARCODE_SCANNER0]  132.33,40.39 0 bottom
U$99  [BREAKOUT_BOARD1]  130.68,38.86 0 bottom
U$100  [SPARKX-MEDIUM]  124.71,42.93 0 bottom
U$101  [OSHW-LOGO-S_COPPER]  114.17,46.61 270 bottom
U$102  [STAT__5]  123.44,37.08 270 bottom
U$103  [TRIG__4]  120.9,36.96 270 bottom
U$104  [TRIG__4]  120.9,36.96 270 top
U$105  [3V3__3]  118.36,36.45 270 top
U$106  [3V3__3]  118.36,36.45 270 bottom
U$107  [TX__2]  115.82,35.69 270 bottom
U$108  [TX__2]  115.82,35.69 270 top
U$109  [RX__1]  113.28,35.56 270 top
U$110  [RX__1]  113.28,35.56 270 bottom
U$111  [GND__0]  110.74,36.58 270 bottom
U$112  [GND__0]  110.74,36.58 270 top
U$113  [STATUS3]  123.32,35.31 0 top
U$114  [LED0]  129.29,33.66 0 bottom
U$115  BARCODE_SCANNER_MOUNT  [BARCODE_SCANNER_MOUNT]  44.96,65.02 180 bottom
U$116  [SCAN4]  41.15,67.82 270 top
U$117  [2D_BARCODE_SCANNER0]  37.34,63.75 0 bottom
U$118  [BREAKOUT_BOARD1]  35.69,62.23 0 bottom
U$119  [SPARKX-MEDIUM]  29.72,66.29 0 bottom
U$120  [OSHW-LOGO-S_COPPER]  19.18,69.98 270 bottom
U$121  [STAT__5]  28.45,60.45 270 bottom
U$122  [TRIG__4]  25.91,60.32 270 bottom
U$123  [TRIG__4]  25.91,60.32 270 top
U$124  [3V3__3]  23.37,59.82 270 top
U$125  [3V3__3]  23.37,59.82 270 bottom
U$126  [TX__2]  20.83,59.05 270 bottom
U$127  [TX__2]  20.83,59.05 270 top
U$128  [RX__1]  18.29,58.93 270 top
U$129  [RX__1]  18.29,58.93 270 bottom
U$130  [GND__0]  15.75,59.94 270 bottom
U$131  [GND__0]  15.75,59.94 270 top
U$132  [STATUS3]  28.32,58.67 0 top
U$133  [LED0]  34.29,57.02 0 bottom
U$134  BARCODE_SCANNER_MOUNT  [BARCODE_SCANNER_MOUNT]  92.46,65.02 180 bottom
U$135  [SCAN4]  88.65,67.82 270 top
U$136  [2D_BARCODE_SCANNER0]  84.84,63.75 0 bottom
U$137  [BREAKOUT_BOARD1]  83.19,62.23 0 bottom
U$138  [SPARKX-MEDIUM]  77.22,66.29 0 bottom
U$139  [OSHW-LOGO-S_COPPER]  66.67,69.98 270 bottom
U$140  [STAT__5]  75.95,60.45 270 bottom
U$141  [TRIG__4]  73.41,60.32 270 bottom
U$142  [TRIG__4]  73.41,60.32 270 top
U$143  [3V3__3]  70.87,59.82 270 top
U$144  [3V3__3]  70.87,59.82 270 bottom
U$145  [TX__2]  68.33,59.05 270 bottom
U$146  [TX__2]  68.33,59.05 270 top
U$147  [RX__1]  65.79,58.93 270 top
U$148  [RX__1]  65.79,58.93 270 bottom
U$149  [GND__0]  63.25,59.94 270 bottom
U$150  [GND__0]  63.25,59.94 270 top
U$151  [STATUS3]  75.82,58.67 0 top
U$152  [LED0]  81.79,57.02 0 bottom
U$153  BARCODE_SCANNER_MOUNT  [BARCODE_SCANNER_MOUNT]  139.95,65.02 180 bottom
U$154  [SCAN4]  136.14,67.82 270 top
U$155  [2D_BARCODE_SCANNER0]  132.33,63.75 0 bottom
U$156  [BREAKOUT_BOARD1]  130.68,62.23 0 bottom
U$157  [SPARKX-MEDIUM]  124.71,66.29 0 bottom
U$158  [OSHW-LOGO-S_COPPER]  114.17,69.98 270 bottom
U$159  [STAT__5]  123.44,60.45 270 bottom
U$160  [TRIG__4]  120.9,60.32 270 bottom
U$161  [TRIG__4]  120.9,60.32 270 top
U$162  [3V3__3]  118.36,59.82 270 top
U$163  [3V3__3]  118.36,59.82 270 bottom
U$164  [TX__2]  115.82,59.05 270 bottom
U$165  [TX__2]  115.82,59.05 270 top
U$166  [RX__1]  113.28,58.93 270 top
U$167  [RX__1]  113.28,58.93 270 bottom
U$168  [GND__0]  110.74,59.94 270 bottom
U$169  [GND__0]  110.74,59.94 270 top
U$170  [STATUS3]  123.32,58.67 0 top
U$171  [LED0]  129.29,57.02 0 bottom
U$172  BARCODE_SCANNER_MOUNT  [BARCODE_SCANNER_MOUNT]  44.96,88.39 180 bottom
U$173  [SCAN4]  41.15,91.19 270 top
U$174  [2D_BARCODE_SCANNER0]  37.34,87.12 0 bottom
U$175  [BREAKOUT_BOARD1]  35.69,85.6 0 bottom
U$176  [SPARKX-MEDIUM]  29.72,89.66 0 bottom
U$177  [OSHW-LOGO-S_COPPER]  19.18,93.34 270 bottom
U$178  [STAT__5]  28.45,83.82 270 bottom
U$179  [TRIG__4]  25.91,83.69 270 bottom
U$180  [TRIG__4]  25.91,83.69 270 top
U$181  [3V3__3]  23.37,83.19 270 top
U$182  [3V3__3]  23.37,83.19 270 bottom
U$183  [TX__2]  20.83,82.42 270 bottom
U$184  [TX__2]  20.83,82.42 270 top
U$185  [RX__1]  18.29,82.3 270 top
U$186  [RX__1]  18.29,82.3 270 bottom
U$187  [GND__0]  15.75,83.31 270 bottom
U$188  [GND__0]  15.75,83.31 270 top
U$189  [STATUS3]  28.32,82.04 0 top
U$190  [LED0]  34.29,80.39 0 bottom
U$191  BARCODE_SCANNER_MOUNT  [BARCODE_SCANNER_MOUNT]  92.46,88.39 180 bottom
U$192  [SCAN4]  88.65,91.19 270 top
U$193  [2D_BARCODE_SCANNER0]  84.84,87.12 0 bottom
U$194  [BREAKOUT_BOARD1]  83.19,85.6 0 bottom
U$195  [SPARKX-MEDIUM]  77.22,89.66 0 bottom
U$196  [OSHW-LOGO-S_COPPER]  66.67,93.34 270 bottom
U$197  [STAT__5]  75.95,83.82 270 bottom
U$198  [TRIG__4]  73.41,83.69 270 bottom
U$199  [TRIG__4]  73.41,83.69 270 top
U$200  [3V3__3]  70.87,83.19 270 top
U$201  [3V3__3]  70.87,83.19 270 bottom
U$202  [TX__2]  68.33,82.42 270 bottom
U$203  [TX__2]  68.33,82.42 270 top
U$204  [RX__1]  65.79,82.3 270 top
U$205  [RX__1]  65.79,82.3 270 bottom
U$206  [GND__0]  63.25,83.31 270 bottom
U$207  [GND__0]  63.25,83.31 270 top
U$208  [STATUS3]  75.82,82.04 0 top
U$209  [LED0]  81.79,80.39 0 bottom
U$210  BARCODE_SCANNER_MOUNT  [BARCODE_SCANNER_MOUNT]  139.95,88.39 180 bottom
U$211  [SCAN4]  136.14,91.19 270 top
U$212  [2D_BARCODE_SCANNER0]  132.33,87.12 0 bottom
U$213  [BREAKOUT_BOARD1]  130.68,85.6 0 bottom
U$214  [SPARKX-MEDIUM]  124.71,89.66 0 bottom
U$215  [OSHW-LOGO-S_COPPER]  114.17,93.34 270 bottom
U$216  [STAT__5]  123.44,83.82 270 bottom
U$217  [TRIG__4]  120.9,83.69 270 bottom
U$218  [TRIG__4]  120.9,83.69 270 top
U$219  [3V3__3]  118.36,83.19 270 top
U$220  [3V3__3]  118.36,83.19 270 bottom
U$221  [TX__2]  115.82,82.42 270 bottom
U$222  [TX__2]  115.82,82.42 270 top
U$223  [RX__1]  113.28,82.3 270 top
U$224  [RX__1]  113.28,82.3 270 bottom
U$225  [GND__0]  110.74,83.31 270 bottom
U$226  [GND__0]  110.74,83.31 270 top
U$227  [STATUS3]  123.32,82.04 0 top
U$228  [LED0]  129.29,80.39 0 bottom
U$229  BARCODE_SCANNER_MOUNT  [BARCODE_SCANNER_MOUNT]  44.96,111.76 180 bottom
U$230  [SCAN4]  41.15,114.55 270 top
U$231  [2D_BARCODE_SCANNER0]  37.34,110.49 0 bottom
U$232  [BREAKOUT_BOARD1]  35.69,108.97 0 bottom
U$233  [SPARKX-MEDIUM]  29.72,113.03 0 bottom
U$234  [OSHW-LOGO-S_COPPER]  19.18,116.71 270 bottom
U$235  [STAT__5]  28.45,107.19 270 bottom
U$236  [TRIG__4]  25.91,107.06 270 bottom
U$237  [TRIG__4]  25.91,107.06 270 top
U$238  [3V3__3]  23.37,106.55 270 top
U$239  [3V3__3]  23.37,106.55 270 bottom
U$240  [TX__2]  20.83,105.79 270 bottom
U$241  [TX__2]  20.83,105.79 270 top
U$242  [RX__1]  18.29,105.66 270 top
U$243  [RX__1]  18.29,105.66 270 bottom
U$244  [GND__0]  15.75,106.68 270 bottom
U$245  [GND__0]  15.75,106.68 270 top
U$246  [STATUS3]  28.32,105.41 0 top
U$247  [LED0]  34.29,103.76 0 bottom
U$248  BARCODE_SCANNER_MOUNT  [BARCODE_SCANNER_MOUNT]  92.46,111.76 180 bottom
U$249  [SCAN4]  88.65,114.55 270 top
U$250  [2D_BARCODE_SCANNER0]  84.84,110.49 0 bottom
U$251  [BREAKOUT_BOARD1]  83.19,108.97 0 bottom
U$252  [SPARKX-MEDIUM]  77.22,113.03 0 bottom
U$253  [OSHW-LOGO-S_COPPER]  66.67,116.71 270 bottom
U$254  [STAT__5]  75.95,107.19 270 bottom
U$255  [TRIG__4]  73.41,107.06 270 bottom
U$256  [TRIG__4]  73.41,107.06 270 top
U$257  [3V3__3]  70.87,106.55 270 top
U$258  [3V3__3]  70.87,106.55 270 bottom
U$259  [TX__2]  68.33,105.79 270 bottom
U$260  [TX__2]  68.33,105.79 270 top
U$261  [RX__1]  65.79,105.66 270 top
U$262  [RX__1]  65.79,105.66 270 bottom
U$263  [GND__0]  63.25,106.68 270 bottom
U$264  [GND__0]  63.25,106.68 270 top
U$265  [STATUS3]  75.82,105.41 0 top
U$266  [LED0]  81.79,103.76 0 bottom
U$267  BARCODE_SCANNER_MOUNT  [BARCODE_SCANNER_MOUNT]  139.95,111.76 180 bottom
U$268  [SCAN4]  136.14,114.55 270 top
U$269  [2D_BARCODE_SCANNER0]  132.33,110.49 0 bottom
U$270  [BREAKOUT_BOARD1]  130.68,108.97 0 bottom
U$271  [SPARKX-MEDIUM]  124.71,113.03 0 bottom
U$272  [OSHW-LOGO-S_COPPER]  114.17,116.71 270 bottom
U$273  [STAT__5]  123.44,107.19 270 bottom
U$274  [TRIG__4]  120.9,107.06 270 bottom
U$275  [TRIG__4]  120.9,107.06 270 top
U$276  [3V3__3]  118.36,106.55 270 top
U$277  [3V3__3]  118.36,106.55 270 bottom
U$278  [TX__2]  115.82,105.79 270 bottom
U$279  [TX__2]  115.82,105.79 270 top
U$280  [RX__1]  113.28,105.66 270 top
U$281  [RX__1]  113.28,105.66 270 bottom
U$282  [GND__0]  110.74,106.68 270 bottom
U$283  [GND__0]  110.74,106.68 270 top
U$284  [STATUS3]  123.32,105.41 0 top
U$285  [LED0]  129.29,103.76 0 bottom

## Library data of the parts
C1 C2 C4 C5 C7 C8 C10 C11 C13 C14 C16 C17 C19 C20 C22 C23 C25 C26 C28 C29 C31 C32 C34 C35 C37 C38 C40 C41 C43 C44 = SparkFun-Capacitors; PROD_ID: CAP-00868
C3 C6 C9 C12 C15 C18 C21 C24 C27 C30 C33 C36 C39 C42 C45 = SparkFun-Capacitors; PROD_ID: CAP-00810
D1-D15 = SparkFun-LED; PROD_ID: DIO-00821
E$1-E$4 U$21 U$25 U$44 U$63 U$82 U$101 U$120 U$139 U$158 U$177 U$196 U$215 U$234 U$253 U$272 = SparkFun-Aesthetics
E$5 = SparkFun-Retired
FRAME1-FRAME15 = SparkFun-Aesthetics; DESIGNER: Nobody; VERSION: v01
H1-H30 U$1 U$16 U$39 U$58 U$77 U$96 U$115 U$134 U$153 U$172 U$191 U$210 U$229 U$248 U$267 = SparkFun-Hardware
J1 J3 J7 J10 J13 J16 J19 J22 J25 J28 J31 J34 J37 J40 J43 = SparkFun-Connectors
J2 J5 J8 J11 J14 J17 J20 J23 J26 J29 J32 J35 J38 J41 J44 = SparkFun-Connectors; PROD_ID: CONN-14122
J4 J6 J9 J12 J15 J18 J21 J24 J27 J30 J33 J36 J39 J42 J45 = SparkFun-Connectors; PROD_ID: CONN-08437
JP1-JP15 = SparkFun-Jumpers
LS1-LS15 = SparkFun-Electromechanical; PROD_ID: COMP-08568
Q1-Q30 = SparkFun-DiscreteSemi; PROD_ID: TRANS-08049
R1 R16 R24 R32 R40 R48 R56 R64 R72 R80 R88 R96 R104 R112 R120 = SparkFun-Resistors; PROD_ID: RES-07869
R2-R5 R17 R18 R25 R26 R33 R34 R41 R42 R49 R50 R57 R58 R65 R66 R73 R74 R81 R82 R89 R90 R97 R98 R105 R106 R113 R114 = SparkFun-Resistors; PROD_ID: RES-12083
R6 R7 R19 R27 R35 R43 R51 R59 R67 R75 R83 R91 R99 R107 R115 = SparkFun-Resistors; PROD_ID: RES-09834
R8 R10 R12 R14 R20 R22 R28 R30 R36 R38 R44 R46 R52 R54 R60 R62 R68 R70 R76 R78 R84 R86 R92 R94 R100 R102 R108 R110 R116 R118 = SparkFun-Resistors; PROD_ID: RES-00824
R9 R11 R13 R15 R21 R23 R29 R31 R37 R39 R45 R47 R53 R55 R61 R63 R69 R71 R77 R79 R85 R87 R93 R95 R101 R103 R109 R111 R117 R119 = SparkFun-Resistors; PROD_ID: RES-07856
S1-S15 = SparkFun-Switches; PROD_ID: SWCH-14139
U1-U15 = SparkFun-IC-Power; PROD_ID: VREG-12457
U$2 U$7 U$19 U$37 U$40 U$56 U$59 U$75 U$78 U$94 U$97 U$113 U$116 U$132 U$135 U$151 U$154 U$170 U$173 U$189 U$192 U$208 U$211 U$227 U$230 U$246 U$249 U$265 U$268 U$284 = buzzard_labels
U$3-U$6 U$9-U$15 U$26-U$36 U$45-U$55 U$64-U$74 U$83-U$93 U$102-U$112 U$121-U$131 U$140-U$150 U$159-U$169 U$178-U$188 U$197-U$207 U$216-U$226 U$235-U$245 U$254-U$264 U$273-U$283 = buzzard_labels (32)
U$8 U$38 U$57 U$76 U$95 U$114 U$133 U$152 U$171 U$190 U$209 U$228 U$247 U$266 U$285 = buzzard_labels (33)
U$17 U$18 U$22 U$23 U$41 U$42 U$60 U$61 U$79 U$80 U$98 U$99 U$117 U$118 U$136 U$137 U$155 U$156 U$174 U$175 U$193 U$194 U$212 U$213 U$231 U$232 U$250 U$251 U$269 U$270 = buzzard_labels (2)
U$20 U$24 U$43 U$62 U$81 U$100 U$119 U$138 U$157 U$176 U$195 U$214 U$233 U$252 U$271 = SparkX

## Nets
3.3V [power]: C2.1 J1.P$11 J4.3 Q2.3 R7.2 U1.5
3.3V1 [power]: C5.1 J3.P$11 J6.3 Q4.3 R6.2 U2.5
3.3V2 [power]: C8.1 J7.P$11 J9.3 Q6.3 R19.2 U3.5
3.3V3 [power]: C11.1 J10.P$11 J12.3 Q8.3 R27.2 U4.5
3.3V4 [power]: C14.1 J13.P$11 J15.3 Q10.3 R35.2 U5.5
3.3V5 [power]: C17.1 J16.P$11 J18.3 Q12.3 R43.2 U6.5
3.3V6 [power]: C20.1 J19.P$11 J21.3 Q14.3 R51.2 U7.5
3.3V7 [power]: C23.1 J22.P$11 J24.3 Q16.3 R59.2 U8.5
3.3V8 [power]: C26.1 J25.P$11 J27.3 Q18.3 R67.2 U9.5
3.3V9 [power]: C29.1 J28.P$11 J30.3 Q20.3 R75.2 U10.5
3.3V10 [power]: C32.1 J31.P$11 J33.3 Q22.3 R83.2 U11.5
3.3V11 [power]: C35.1 J34.P$11 J36.3 Q24.3 R91.2 U12.5
3.3V12 [power]: C38.1 J37.P$11 J39.3 Q26.3 R99.2 U13.5
3.3V13 [power]: C41.1 J40.P$11 J42.3 Q28.3 R107.2 U14.5
3.3V14 [power]: C44.1 J43.P$11 J45.3 Q30.3 R115.2 U15.5
5V: C1.1 J2.VBUS1 J2.VBUS2 U1.1 U1.3
5V1: C4.1 J5.VBUS1 J5.VBUS2 U2.1 U2.3
5V2: C7.1 J8.VBUS1 J8.VBUS2 U3.1 U3.3
5V3: C10.1 J11.VBUS1 J11.VBUS2 U4.1 U4.3
5V4: C13.1 J14.VBUS1 J14.VBUS2 U5.1 U5.3
5V5: C16.1 J17.VBUS1 J17.VBUS2 U6.1 U6.3
5V6: C19.1 J20.VBUS1 J20.VBUS2 U7.1 U7.3
5V7: C22.1 J23.VBUS1 J23.VBUS2 U8.1 U8.3
5V8: C25.1 J26.VBUS1 J26.VBUS2 U9.1 U9.3
5V9: C28.1 J29.VBUS1 J29.VBUS2 U10.1 U10.3
5V10: C31.1 J32.VBUS1 J32.VBUS2 U11.1 U11.3
5V11: C34.1 J35.VBUS1 J35.VBUS2 U12.1 U12.3
5V12: C37.1 J38.VBUS1 J38.VBUS2 U13.1 U13.3
5V13: C40.1 J41.VBUS1 J41.VBUS2 U14.1 U14.3
5V14: C43.1 J44.VBUS1 J44.VBUS2 U15.1 U15.3
BUZZER: J1.P$4 R9.1
BUZZER1: J3.P$4 R13.1
BUZZER2: J7.P$4 R21.1
BUZZER3: J10.P$4 R29.1
BUZZER4: J13.P$4 R37.1
BUZZER5: J16.P$4 R45.1
BUZZER6: J19.P$4 R53.1
BUZZER7: J22.P$4 R61.1
BUZZER8: J25.P$4 R69.1
BUZZER9: J28.P$4 R77.1
BUZZER10: J31.P$4 R85.1
BUZZER11: J34.P$4 R93.1
BUZZER12: J37.P$4 R101.1
BUZZER13: J40.P$4 R109.1
BUZZER14: J43.P$4 R117.1
CC1: J5.A5 R5.2
CC2: J5.B5 R4.2
CC3: J2.A5 R3.2
CC4: J2.B5 R2.2
CC5: J8.A5 R18.2
CC6: J8.B5 R17.2
CC7: J11.A5 R26.2
CC8: J11.B5 R25.2
CC9: J14.A5 R34.2
CC10: J14.B5 R33.2
CC11: J17.A5 R42.2
CC12: J17.B5 R41.2
CC13: J20.A5 R50.2
CC14: J20.B5 R49.2
CC15: J23.A5 R58.2
CC16: J23.B5 R57.2
CC17: J26.A5 R66.2
CC18: J26.B5 R65.2
CC19: J29.A5 R74.2
CC20: J29.B5 R73.2
CC21: J32.A5 R82.2
CC22: J32.B5 R81.2
CC23: J35.A5 R90.2
CC24: J35.B5 R89.2
CC25: J38.A5 R98.2
CC26: J38.B5 R97.2
CC27: J41.A5 R106.2
CC28: J41.B5 R105.2
CC29: J44.A5 R114.2
CC30: J44.B5 R113.2
GND [power]: C1.2 C2.2 C3.2 D2.C J1.P$10 J1.P$13 J1.P$14 J2.GND J2.GND2 J4.6 Q1.2 R2.1 R3.1 R8.1 R10.1 S2.1 U1.2
GND1 [power]: C4.2 C5.2 C6.2 D1.C J3.P$10 J3.P$13 J3.P$14 J5.GND J5.GND2 J6.6 Q3.2 R4.1 R5.1 R12.1 R14.1 S1.1 U2.2
GND2 [power]: C7.2 C8.2 C9.2 D3.C J7.P$10 J7.P$13 J7.P$14 J8.GND J8.GND2 J9.6 Q5.2 R17.1 R18.1 R20.1 R22.1 S3.1 U3.2
GND3 [power]: C10.2 C11.2 C12.2 D4.C J10.P$10 J10.P$13 J10.P$14 J11.GND J11.GND2 J12.6 Q7.2 R25.1 R26.1 R28.1 R30.1 S4.1 U4.2
GND4 [power]: C13.2 C14.2 C15.2 D5.C J13.P$10 J13.P$13 J13.P$14 J14.GND J14.GND2 J15.6 Q9.2 R33.1 R34.1 R36.1 R38.1 S5.1 U5.2
GND5 [power]: C16.2 C17.2 C18.2 D6.C J16.P$10 J16.P$13 J16.P$14 J17.GND J17.GND2 J18.6 Q11.2 R41.1 R42.1 R44.1 R46.1 S6.1 U6.2
GND6 [power]: C19.2 C20.2 C21.2 D7.C J19.P$10 J19.P$13 J19.P$14 J20.GND J20.GND2 J21.6 Q13.2 R49.1 R50.1 R52.1 R54.1 S7.1 U7.2
GND7 [power]: C22.2 C23.2 C24.2 D8.C J22.P$10 J22.P$13 J22.P$14 J23.GND J23.GND2 J24.6 Q15.2 R57.1 R58.1 R60.1 R62.1 S8.1 U8.2
GND8 [power]: C25.2 C26.2 C27.2 D9.C J25.P$10 J25.P$13 J25.P$14 J26.GND J26.GND2 J27.6 Q17.2 R65.1 R66.1 R68.1 R70.1 S9.1 U9.2
GND9 [power]: C28.2 C29.2 C30.2 D10.C J28.P$10 J28.P$13 J28.P$14 J29.GND J29.GND2 J30.6 Q19.2 R73.1 R74.1 R76.1 R78.1 S10.1 U10.2
GND10 [power]: C31.2 C32.2 C33.2 D11.C J31.P$10 J31.P$13 J31.P$14 J32.GND J32.GND2 J33.6 Q21.2 R81.1 R82.1 R84.1 R86.1 S11.1 U11.2
GND11 [power]: C34.2 C35.2 C36.2 D12.C J34.P$10 J34.P$13 J34.P$14 J35.GND J35.GND2 J36.6 Q23.2 R89.1 R90.1 R92.1 R94.1 S12.1 U12.2
GND12 [power]: C37.2 C38.2 C39.2 D13.C J37.P$10 J37.P$13 J37.P$14 J38.GND J38.GND2 J39.6 Q25.2 R97.1 R98.1 R100.1 R102.1 S13.1 U13.2
GND13 [power]: C40.2 C41.2 C42.2 D14.C J40.P$10 J40.P$13 J40.P$14 J41.GND J41.GND2 J42.6 Q27.2 R105.1 R106.1 R108.1 R110.1 S14.1 U14.2
GND14 [power]: C43.2 C44.2 C45.2 D15.C J43.P$10 J43.P$13 J43.P$14 J44.GND J44.GND2 J45.6 Q29.2 R113.1 R114.1 R116.1 R118.1 S15.1 U15.2
N$1: LS2.- Q3.3
N$2: LS1.- Q1.3
N$3: LS1.+ R7.1
N$4: Q2.2 R1.2
N$5: Q1.1 R8.2 R9.2
N$6: LS2.+ R6.1
N$7: Q2.1 R10.2 R11.2
N$8: D2.A JP1.1
N$9: Q3.1 R12.2 R13.2
N$10: Q4.2 R16.2
N$11: Q4.1 R14.2 R15.2
N$12: D1.A JP2.1
N$13: LS3.- Q5.3
N$14: LS3.+ R19.1
N$15: Q5.1 R20.2 R21.2
N$16: Q6.2 R24.2
N$17: Q6.1 R22.2 R23.2
N$18: D3.A JP3.1
N$19: LS4.- Q7.3
N$20: LS4.+ R27.1
N$21: Q7.1 R28.2 R29.2
N$22: Q8.2 R32.2
N$23: Q8.1 R30.2 R31.2
N$24: D4.A JP4.1
N$25: LS5.- Q9.3
N$26: LS5.+ R35.1
N$27: Q9.1 R36.2 R37.2
N$28: Q10.2 R40.2
N$29: Q10.1 R38.2 R39.2
N$30: D5.A JP5.1
N$31: LS6.- Q11.3
N$32: LS6.+ R43.1
N$33: Q11.1 R44.2 R45.2
N$34: Q12.2 R48.2
N$35: Q12.1 R46.2 R47.2
N$36: D6.A JP6.1
N$37: LS7.- Q13.3
N$38: LS7.+ R51.1
N$39: Q13.1 R52.2 R53.2
N$40: Q14.2 R56.2
N$41: Q14.1 R54.2 R55.2
N$42: D7.A JP7.1
N$43: LS8.- Q15.3
N$44: LS8.+ R59.1
N$45: Q15.1 R60.2 R61.2
N$46: Q16.2 R64.2
N$47: Q16.1 R62.2 R63.2
N$48: D8.A JP8.1
N$49: LS9.- Q17.3
N$50: LS9.+ R67.1
N$51: Q17.1 R68.2 R69.2
N$52: Q18.2 R72.2
N$53: Q18.1 R70.2 R71.2
N$54: D9.A JP9.1
N$55: LS10.- Q19.3
N$56: LS10.+ R75.1
N$57: Q19.1 R76.2 R77.2
N$58: Q20.2 R80.2
N$59: Q20.1 R78.2 R79.2
N$60: D10.A JP10.1
N$61: LS11.- Q21.3
N$62: LS11.+ R83.1
N$63: Q21.1 R84.2 R85.2
N$64: Q22.2 R88.2
N$65: Q22.1 R86.2 R87.2
N$66: D11.A JP11.1
N$67: LS12.- Q23.3
N$68: LS12.+ R91.1
N$69: Q23.1 R92.2 R93.2
N$70: Q24.2 R96.2
N$71: Q24.1 R94.2 R95.2
N$72: D12.A JP12.1
N$73: LS13.- Q25.3
N$74: LS13.+ R99.1
N$75: Q25.1 R100.2 R101.2
N$76: Q26.2 R104.2
N$77: Q26.1 R102.2 R103.2
N$78: D13.A JP13.1
N$79: LS14.- Q27.3
N$80: LS14.+ R107.1
N$81: Q27.1 R108.2 R109.2
N$82: Q28.2 R112.2
N$83: Q28.1 R110.2 R111.2
N$84: D14.A JP14.1
N$85: LS15.- Q29.3
N$86: LS15.+ R115.1
N$87: Q29.1 R116.2 R117.2
N$88: Q30.2 R120.2
N$89: Q30.1 R118.2 R119.2
N$90: D15.A JP15.1
RXI: J1.P$8 J4.5
RXI1: J3.P$8 J6.5
RXI2: J7.P$8 J9.5
RXI3: J10.P$8 J12.5
RXI4: J13.P$8 J15.5
RXI5: J16.P$8 J18.5
RXI6: J19.P$8 J21.5
RXI7: J22.P$8 J24.5
RXI8: J25.P$8 J27.5
RXI9: J28.P$8 J30.5
RXI10: J31.P$8 J33.5
RXI11: J34.P$8 J36.5
RXI12: J37.P$8 J39.5
RXI13: J40.P$8 J42.5
RXI14: J43.P$8 J45.5
SCAN_TRIGGER: C3.1 J1.P$1 J4.2 S2.3
SCAN_TRIGGER1: C6.1 J3.P$1 J6.2 S1.3
SCAN_TRIGGER2: C9.1 J7.P$1 J9.2 S3.3
SCAN_TRIGGER3: C12.1 J10.P$1 J12.2 S4.3
SCAN_TRIGGER4: C15.1 J13.P$1 J15.2 S5.3
SCAN_TRIGGER5: C18.1 J16.P$1 J18.2 S6.3
SCAN_TRIGGER6: C21.1 J19.P$1 J21.2 S7.3
SCAN_TRIGGER7: C24.1 J22.P$1 J24.2 S8.3
SCAN_TRIGGER8: C27.1 J25.P$1 J27.2 S9.3
SCAN_TRIGGER9: C30.1 J28.P$1 J30.2 S10.3
SCAN_TRIGGER10: C33.1 J31.P$1 J33.2 S11.3
SCAN_TRIGGER11: C36.1 J34.P$1 J36.2 S12.3
SCAN_TRIGGER12: C39.1 J37.P$1 J39.2 S13.3
SCAN_TRIGGER13: C42.1 J40.P$1 J42.2 S14.3
SCAN_TRIGGER14: C45.1 J43.P$1 J45.2 S15.3
SHLD: J2.SHLD1 J2.SHLD2 J2.SHLD3 J2.SHLD4 J2.SHLD5 J2.SHLD6 J2.SHLD7 J2.SHLD8
SHLD1: J5.SHLD1 J5.SHLD2 J5.SHLD3 J5.SHLD4 J5.SHLD5 J5.SHLD6 J5.SHLD7 J5.SHLD8
SHLD2: J8.SHLD1 J8.SHLD2 J8.SHLD3 J8.SHLD4 J8.SHLD5 J8.SHLD6 J8.SHLD7 J8.SHLD8
SHLD3: J11.SHLD1 J11.SHLD2 J11.SHLD3 J11.SHLD4 J11.SHLD5 J11.SHLD6 J11.SHLD7 J11.SHLD8
SHLD4: J14.SHLD1 J14.SHLD2 J14.SHLD3 J14.SHLD4 J14.SHLD5 J14.SHLD6 J14.SHLD7 J14.SHLD8
SHLD5: J17.SHLD1 J17.SHLD2 J17.SHLD3 J17.SHLD4 J17.SHLD5 J17.SHLD6 J17.SHLD7 J17.SHLD8
SHLD6: J20.SHLD1 J20.SHLD2 J20.SHLD3 J20.SHLD4 J20.SHLD5 J20.SHLD6 J20.SHLD7 J20.SHLD8
SHLD7: J23.SHLD1 J23.SHLD2 J23.SHLD3 J23.SHLD4 J23.SHLD5 J23.SHLD6 J23.SHLD7 J23.SHLD8
SHLD8: J26.SHLD1 J26.SHLD2 J26.SHLD3 J26.SHLD4 J26.SHLD5 J26.SHLD6 J26.SHLD7 J26.SHLD8
SHLD9: J29.SHLD1 J29.SHLD2 J29.SHLD3 J29.SHLD4 J29.SHLD5 J29.SHLD6 J29.SHLD7 J29.SHLD8
SHLD10: J32.SHLD1 J32.SHLD2 J32.SHLD3 J32.SHLD4 J32.SHLD5 J32.SHLD6 J32.SHLD7 J32.SHLD8
SHLD11: J35.SHLD1 J35.SHLD2 J35.SHLD3 J35.SHLD4 J35.SHLD5 J35.SHLD6 J35.SHLD7 J35.SHLD8
SHLD12: J38.SHLD1 J38.SHLD2 J38.SHLD3 J38.SHLD4 J38.SHLD5 J38.SHLD6 J38.SHLD7 J38.SHLD8
SHLD13: J41.SHLD1 J41.SHLD2 J41.SHLD3 J41.SHLD4 J41.SHLD5 J41.SHLD6 J41.SHLD7 J41.SHLD8
SHLD14: J44.SHLD1 J44.SHLD2 J44.SHLD3 J44.SHLD4 J44.SHLD5 J44.SHLD6 J44.SHLD7 J44.SHLD8
STATUS_LED: J1.P$3 R11.1
STATUS_LED1: J3.P$3 R15.1
STATUS_LED2: J7.P$3 R23.1
STATUS_LED3: J10.P$3 R31.1
STATUS_LED4: J13.P$3 R39.1
STATUS_LED5: J16.P$3 R47.1
STATUS_LED6: J19.P$3 R55.1
STATUS_LED7: J22.P$3 R63.1
STATUS_LED8: J25.P$3 R71.1
STATUS_LED9: J28.P$3 R79.1
STATUS_LED10: J31.P$3 R87.1
STATUS_LED11: J34.P$3 R95.1
STATUS_LED12: J37.P$3 R103.1
STATUS_LED13: J40.P$3 R111.1
STATUS_LED14: J43.P$3 R119.1
STATUS_OUT: J4.1 JP1.2 R1.1
STATUS_OUT1: J6.1 JP2.2 R16.1
STATUS_OUT2: J9.1 JP3.2 R24.1
STATUS_OUT3: J12.1 JP4.2 R32.1
STATUS_OUT4: J15.1 JP5.2 R40.1
STATUS_OUT5: J18.1 JP6.2 R48.1
STATUS_OUT6: J21.1 JP7.2 R56.1
STATUS_OUT7: J24.1 JP8.2 R64.1
STATUS_OUT8: J27.1 JP9.2 R72.1
STATUS_OUT9: J30.1 JP10.2 R80.1
STATUS_OUT10: J33.1 JP11.2 R88.1
STATUS_OUT11: J36.1 JP12.2 R96.1
STATUS_OUT12: J39.1 JP13.2 R104.1
STATUS_OUT13: J42.1 JP14.2 R112.1
STATUS_OUT14: J45.1 JP15.2 R120.1
TXO: J1.P$9 J4.4
TXO1: J3.P$9 J6.4
TXO2: J7.P$9 J9.4
TXO3: J10.P$9 J12.4
TXO4: J13.P$9 J15.4
TXO5: J16.P$9 J18.4
TXO6: J19.P$9 J21.4
TXO7: J22.P$9 J24.4
TXO8: J25.P$9 J27.4
TXO9: J28.P$9 J30.4
TXO10: J31.P$9 J33.4
TXO11: J34.P$9 J36.4
TXO12: J37.P$9 J39.4
TXO13: J40.P$9 J42.4
TXO14: J43.P$9 J45.4
USB_N: J1.P$7 J2.A7 J2.B7
USB_N1: J3.P$7 J5.A7 J5.B7
USB_N2: J7.P$7 J8.A7 J8.B7
USB_N3: J10.P$7 J11.A7 J11.B7
USB_N4: J13.P$7 J14.A7 J14.B7
USB_N5: J16.P$7 J17.A7 J17.B7
USB_N6: J19.P$7 J20.A7 J20.B7
USB_N7: J22.P$7 J23.A7 J23.B7
USB_N8: J25.P$7 J26.A7 J26.B7
USB_N9: J28.P$7 J29.A7 J29.B7
USB_N10: J31.P$7 J32.A7 J32.B7
USB_N11: J34.P$7 J35.A7 J35.B7
USB_N12: J37.P$7 J38.A7 J38.B7
USB_N13: J40.P$7 J41.A7 J41.B7
USB_N14: J43.P$7 J44.A7 J44.B7
USB_P: J1.P$6 J2.A6 J2.B6
USB_P1: J3.P$6 J5.A6 J5.B6
USB_P2: J7.P$6 J8.A6 J8.B6
USB_P3: J10.P$6 J11.A6 J11.B6
USB_P4: J13.P$6 J14.A6 J14.B6
USB_P5: J16.P$6 J17.A6 J17.B6
USB_P6: J19.P$6 J20.A6 J20.B6
USB_P7: J22.P$6 J23.A6 J23.B6
USB_P8: J25.P$6 J26.A6 J26.B6
USB_P9: J28.P$6 J29.A6 J29.B6
USB_P10: J31.P$6 J32.A6 J32.B6
USB_P11: J34.P$6 J35.A6 J35.B6
USB_P12: J37.P$6 J38.A6 J38.B6
USB_P13: J40.P$6 J41.A6 J41.B6
USB_P14: J43.P$6 J44.A6 J44.B6